# EAGLE board ICeePotTransmitter (EAGLE 6.3)
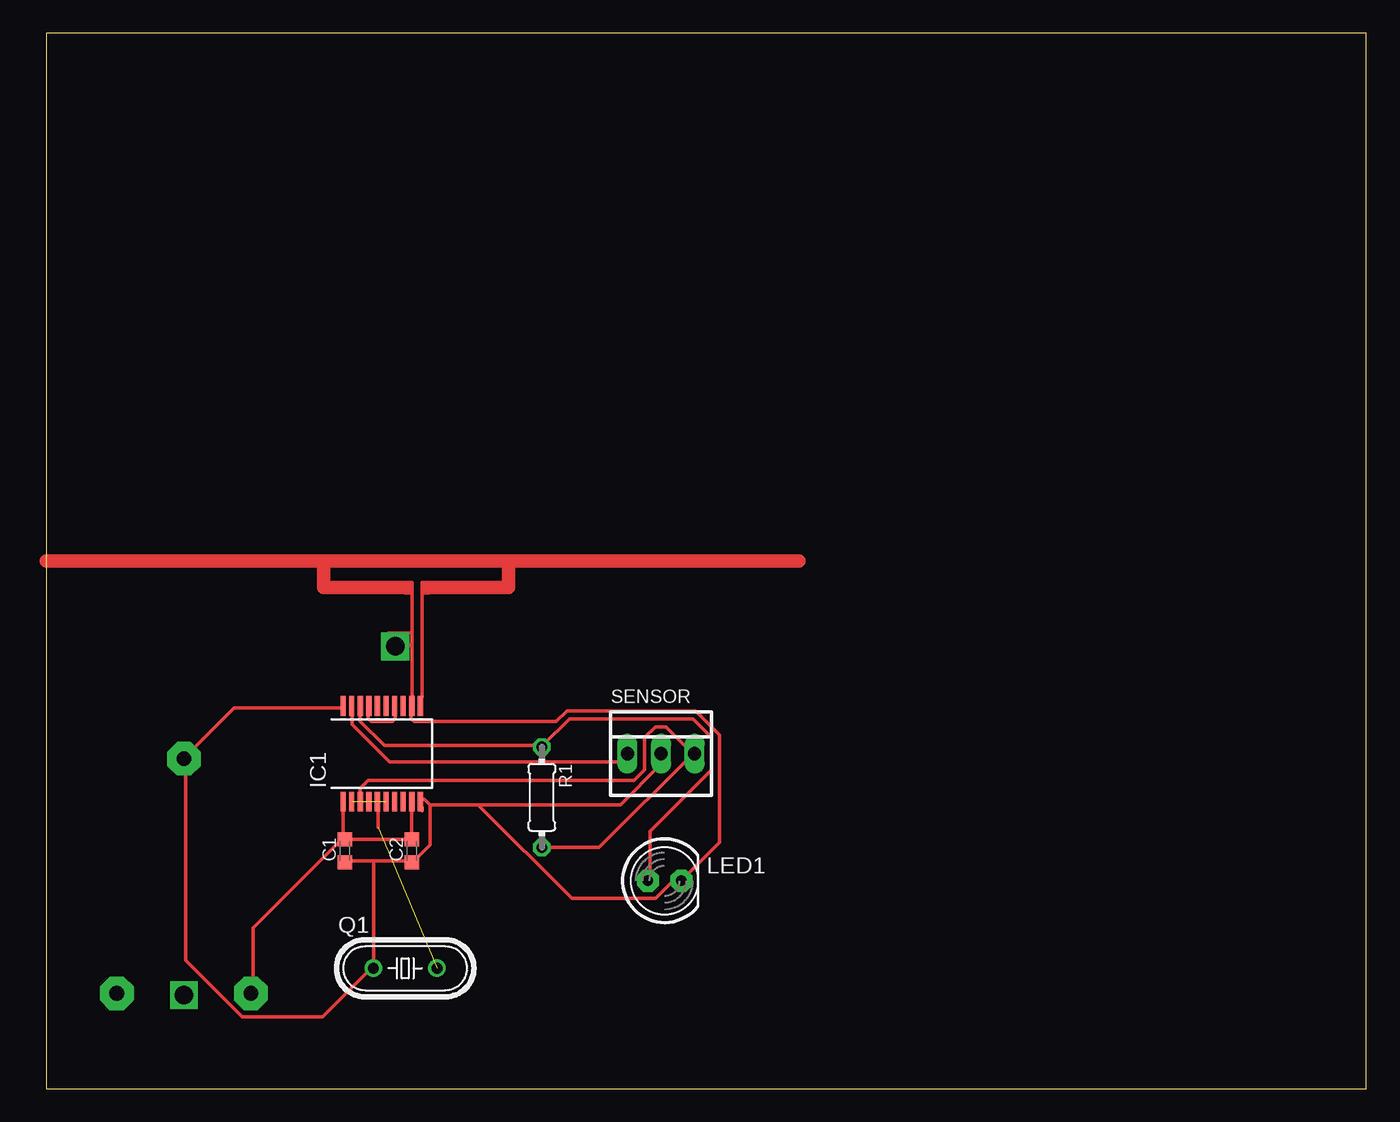
[diagram p0: board, top side]
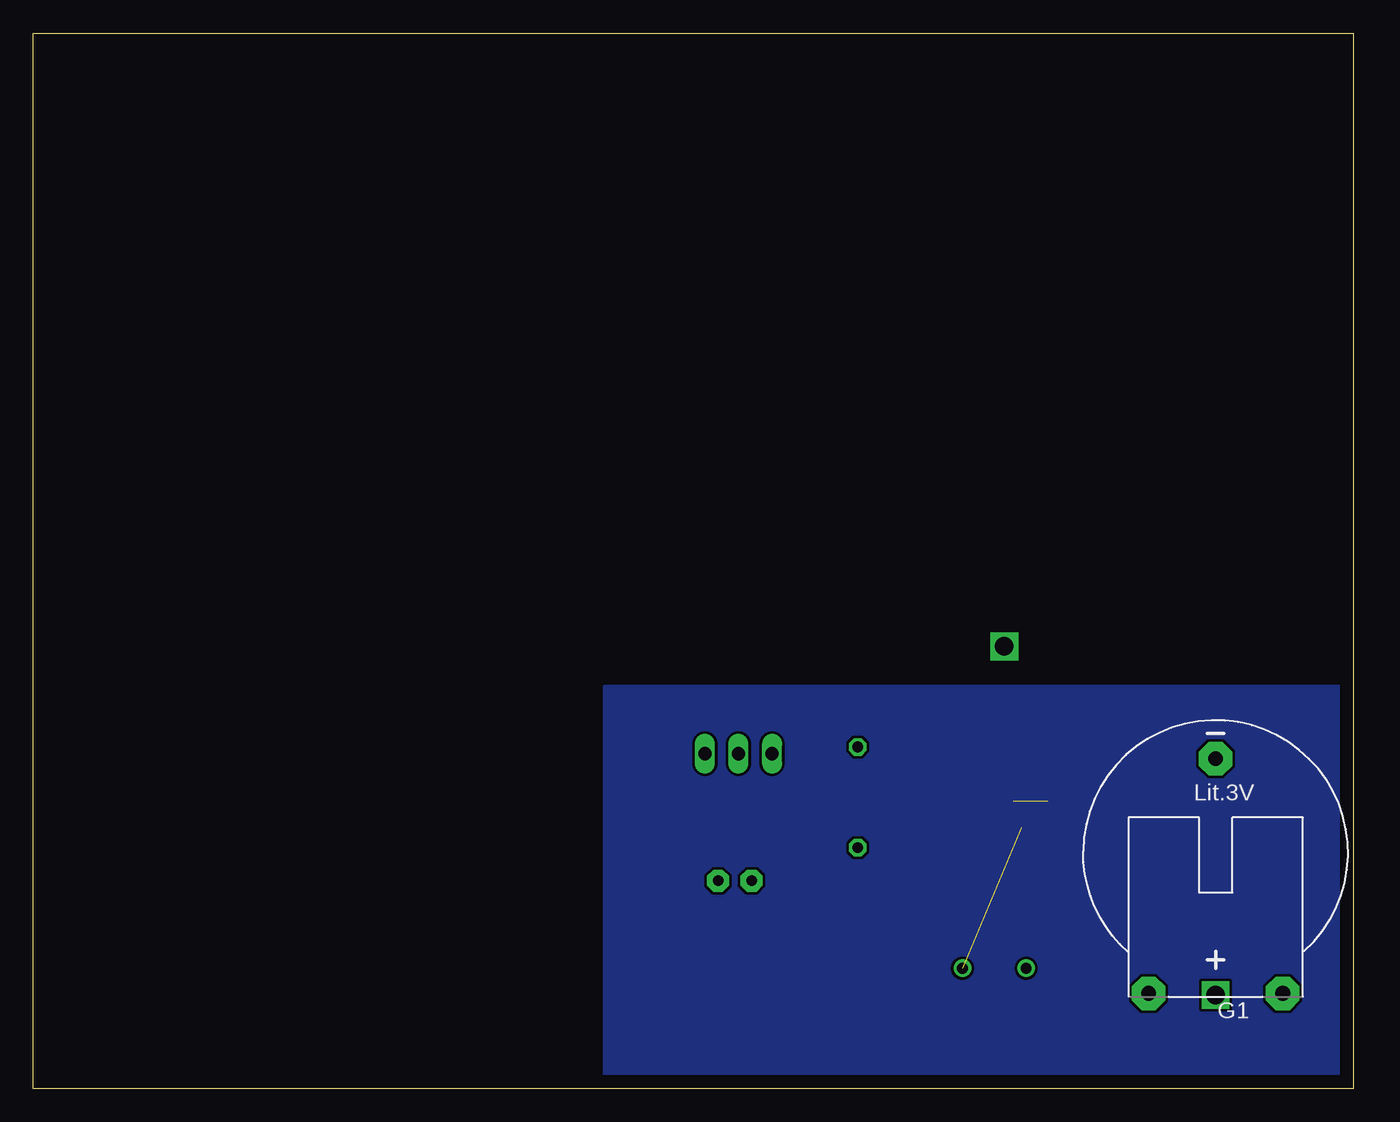
[diagram p1: board, bottom side, seen from below]

Size 100 x 80 mm. Coordinates in mm from the lower left corner, seen from the top.
Outline: 0,0 100,0 100,80 0,80 0,0
Copper layers (1*16): Top 0.035mm / dielectric 1.5mm / Bottom 0.035mm
Design rules "default *": minimum track width 10mil, minimum drill 24mil, track to track 8mil, track to pad 10mil, pad to pad 8mil, via to via 8mil, smd to smd 8mil, copper to edge 40mil, drill to drill 8mil, minimum pad ring 10mil, minimum via ring 8mil, stop-mask expansion 4mil, vias tented up to drill 0mil, thermal gap 10mil

## Footprints (pad centres in the part's own frame; a part is rotated, then mirrored left to right if it is on the bottom)
C0603K = smd 1.05 x 1.08: 1 -0.875,0; 2 0.875,0
CR2032H = drill 1.118 pad 2.54 octagon: + 5.08,10.795; +@1 -5.08,10.795; - 0,-6.985
SOIC20 = smd 0.4 x 1.5: 1 -2.925,-3.625; 2 -2.275,-3.625; 3 -1.625,-3.625; 4 -0.975,-3.625; 5 -0.325,-3.625; 6 0.325,-3.625; 7 0.975,-3.625; 8 1.625,-3.625; 9 2.275,-3.625; 10 2.925,-3.625; 11 2.925,3.625; 12 2.275,3.625; 13 1.625,3.625; 14 0.975,3.625; 15 0.325,3.625; 16 -0.325,3.625; 17 -0.975,3.625; 18 -1.625,3.625; 19 -2.275,3.625; 20 -2.925,3.625
LED5MM = drill 0.813 pad 1.676 octagon: A -1.27,0; K 1.27,0
HC49/S = drill 0.813: 1 -2.413,0; 2 2.413,0
0204/7 = drill 0.813 octagon: 1 -3.81,0; 2 3.81,0
22-23-2031 = drill 1 long: 1 -2.54,0; 2 0,0; 3 2.54,0

## Placement (x,y rotation side)
C1  0.1uF  [C0603K]  22.61,18.03 90 top
C2  330pF  [C0603K]  27.69,18.03 90 top
G1  CR2032H  [CR2032H]  10.41,18.03 180 bottom
IC1  RFPIC12F675  [SOIC20]  25.4,25.4 0 top
LED1  [LED5MM]  46.83,15.78 0 top
Q1  [HC49/S]  27.18,9.14 0 top
R1  [0204/7]  37.53,22.1 270 top
SENSOR  22-23-2031  [22-23-2031]  46.56,25.4 0 top

## Library data of the parts
C1 C2 = rcl
G1 = battery
IC1 = rfpic
LED1 = adafruit
Q1 = crystal; OC_FARNELL: 1667008; OC_NEWARK: unknown
R1 = resistor
SENSOR = con-molex; MF: MOLEX; MPN: 22-23-2031; OC_FARNELL: 1462950; OC_NEWARK: 30C0862

## Nets
N$1: IC1.19 SENSOR.1
N$2: IC1.14 IC1.17
N$3: IC1.18 LED1.A R1.1
N$4: IC1.3 R1.2 SENSOR.3
N$5: C1.2 C2.2 G1.+ IC1.1 IC1.9
N$6: IC1.5 Q1.2
N$7: C1.1 C2.1 G1.- IC1.10 IC1.12 IC1.20 LED1.K Q1.1 SENSOR.2
N$8: IC1.2 IC1.6

## Tracks (layer width: path | path; a pad name or v marks a point on that pad's centre or on a via)
N$1
  Top 0.254: IC1.19 23.16,28.85 23.16,27.64 26.01,24.79 43.28,24.79 43.89,25.4 SENSOR.1
N$2
  Top 0.254: IC1.17 24.38,28.85 24.38,28.04 24.59,27.84 26.21,27.84 26.42,28.04 26.42,28.85 IC1.14
N$3
  Top 0.254: IC1.18 23.77,28.85 23.77,27.84 25.6,26.01 37.39,26.01 R1.1 37.59,26.01 39.62,28.04 48.97,28.04 50.39,26.62 50.39,24.18 45.72,19.51 45.72,15.85 LED1.A
N$4
  Top 0.254: 48.97,25.4 46.94,27.43 46.13,27.43 45.31,26.62 45.31,24.18 44.5,23.37 24.38,23.37 23.77,22.76 23.77,21.95 IC1.3 | R1.2 41.86,18.29 48.97,25.4 | 48.97,25.4 SENSOR.3
N$5
  Top 0.254: C1.2 22.48,18.91 IC1.1 | IC1.9 27.68,18.91 C2.2 27.64,18.9 22.76,18.9 C1.2 | C1.2 22.35,18.9 15.65,12.19 15.65,7.32 G1.+
N$6  (1 unrouted)
  Top 0.254: IC1.5 25.15,21.77 25.15,19.81
N$7
  Top 0.254: IC1.12 27.64,28.85 27.64,28.04 27.84,27.84 38.61,27.84 39.42,28.65 49.17,28.65 51,26.82 51,18.69 48.16,15.85 LED1.K 47.95,15.65 47.35,15.65 46.13,14.43 39.83,14.43 32.72,21.54 | IC1.20 22.35,28.85 14.22,28.85 10.57,25.2 G1.- 10.57,24.99 10.57,9.75 14.83,5.49 20.93,5.49 24.59,9.14 Q1.1 24.79,9.14 24.79,17.27 | 24.79,17.27 22.76,17.27 C1.1 | 29.06,21.54 28.65,21.95 28.45,21.95 IC1.10 | 29.06,21.54 29.06,18.49 27.84,17.27 C2.1 27.64,17.27 24.79,17.27 | 29.06,21.54 32.72,21.54 | 32.72,21.54 43.48,21.54 46.53,24.59 46.53,25.4 SENSOR.2
N$8  (1 unrouted)
N$9
  Top 0.254: 28.45,29.72 28.45,37.59 | 28.45,37.59 28.45,38.35 28.96,38.35 | 28.96,37.59 28.45,37.59
N$10
  Top 0.254: 27.69,29.72 27.69,33.78 | 27.69,33.78 27.69,34.54 | 27.69,34.54 27.69,37.59 | 27.69,37.85 27.69,38.08 | 27.69,33.78 27.43,33.53 | 27.69,34.54 25.91,34.54 | 27.18,38.35 27.69,38.35 27.69,38.1 27.18,38.1 27.18,37.85 27.69,37.85 | 27.69,37.85 27.69,37.59 | 27.69,37.59 27.18,37.59
N$11
  Top 1.016: 27,38 21,38 21,40 | 21,40 0,40 | 21,40 35,40 | 35,40 57,40 | 29,38 35,38 35,40
N$14  (via drill 1.4)
  other vias: 26.42,33.53
N$15
  Top 0.254: 28.45,21.34 28.45,21.08
N$16  (via drill 1.4)
  other vias: 10.41,7.11
VSS
  pour Bottom: 0,0 56.72,0 56.72,30.48 0,30.48